# EAGLE board USBIRtoy.v2a-PTH (EAGLE 5.06)
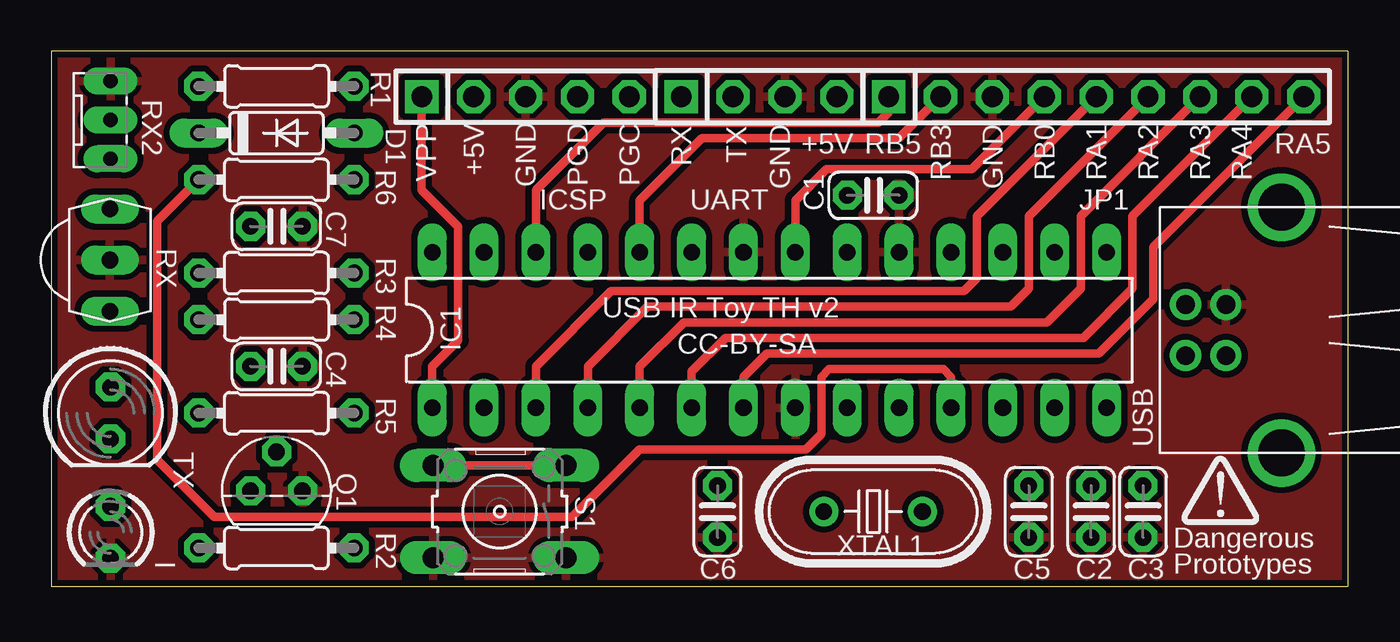
[diagram p0: board, top side]
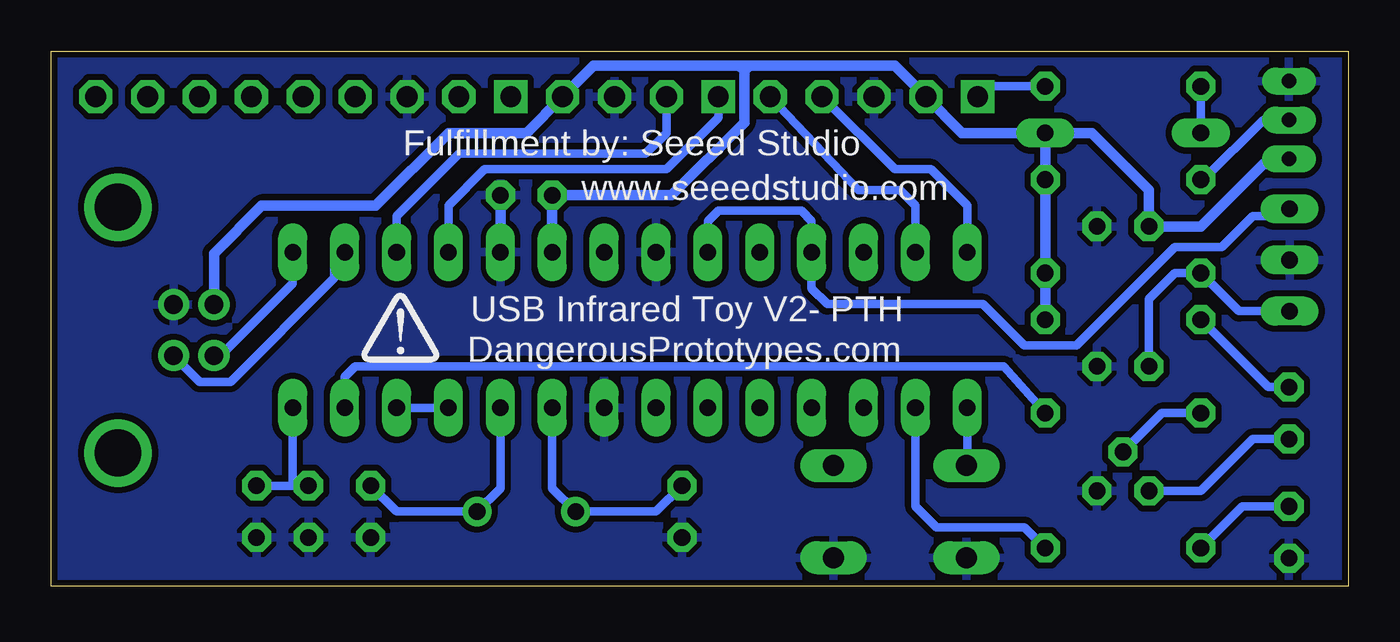
[diagram p1: board, bottom side, seen from below]

Size 63.51 x 26.21 mm. Coordinates in mm from the lower left corner, seen from the top.
Outline: 63.47,0 0,0 0,26.21 63.47,26.21
Outline: 63.51,0 63.51,26.21
Copper layers (1*16): Top 0.035mm / dielectric 1.5mm / Bottom 0.035mm
Design rules "SparkFun": minimum track width 8mil, minimum drill 20mil, track to track 8mil, track to pad 8mil, pad to pad 8mil, via to via 8mil, smd to smd 8mil, copper to edge 10mil, drill to drill 8mil, minimum pad ring 12mil, minimum via ring 10mil, stop-mask expansion 4mil, vias tented up to drill 25mil, thermal gap 10mil

## Footprints (pad centres in the part's own frame; a part is rotated, then mirrored left to right if it is on the bottom)
C025-024X044 = drill 0.813 octagon: 1 -1.27,0; 2 1.27,0
DO35-7 = drill 0.813 long: A 3.81,0; C -3.81,0
LED3MM = drill 0.813 octagon: A -1.27,0; K 1.27,0
DIL28-3 = drill 0.813 long: 1 -16.51,-3.81; 2 -13.97,-3.81; 3 -11.43,-3.81; 4 -8.89,-3.81; 5 -6.35,-3.81; 6 -3.81,-3.81; 7 -1.27,-3.81; 8 1.27,-3.81; 9 3.81,-3.81; 10 6.35,-3.81; 11 8.89,-3.81; 12 11.43,-3.81; 13 13.97,-3.81; 14 16.51,-3.81; 15 16.51,3.81; 16 13.97,3.81; 17 11.43,3.81; 18 8.89,3.81; 19 6.35,3.81; 20 3.81,3.81; 21 1.27,3.81; 22 -1.27,3.81; 23 -3.81,3.81; 24 -6.35,3.81; 25 -8.89,3.81; 26 -11.43,3.81; 27 -13.97,3.81; 28 -16.51,3.81
1X05 = drill 1.016 square: 1 -5.08,0 | drill 1.016 octagon: 2 -2.54,0; 3 0,0; 4 2.54,0; 5 5.08,0
1X09 = drill 1.016 square: 1 -10.16,0 | drill 1.016 octagon: 2 -7.62,0; 3 -5.08,0; 4 -2.54,0; 5 0,0; 6 2.54,0; 7 5.08,0; 8 7.62,0; 9 10.16,0
TO92 = drill 0.813 octagon: 1 1.27,0; 2 0,1.905; 3 -1.27,0
0204/7 = drill 0.813 octagon: 1 -3.81,0; 2 3.81,0
TSOP18XX = drill 0.813 long: GND -0.001,-0.027; OUT -2.501,-0.027; VCC 2.499,-0.027
QSE15X = drill 0.7 long: 1 -1.9,-0.51; 2 0,-0.51; 3 1.91,-0.51
B3F-10XX = drill 1.016 long: 1 -3.251,2.261; 2 3.251,2.261; 3 -3.251,-2.261; 4 3.251,-2.261
LED5MM = drill 0.813 octagon: A -1.27,0; K 1.27,0
1X04 = drill 1.016 square: 1 -3.81,0 | drill 1.016 octagon: 2 -1.27,0; 3 1.27,0; 4 3.81,0
USB-B-H = drill 0.914 round: D+ 0,1.25; D- 1.981,1.25; GND 0,-1.25; VBUS 1.981,-1.25 | drill 2.286 round: GND@1 -2.718,6.02; GND@2 -2.718,-6.02
HC49U70 = drill 0.813 round: 1 -2.413,0; 2 2.413,0

## Placement (x,y rotation side)
C1  0.1uf  [C025-024X044]  40.25,19.15 0 top
C2  0.1uF  [C025-024X044]  50.91,3.66 270 top
C3  0.1uF  [C025-024X044]  53.45,3.66 270 top
C4  0.1uF  [C025-024X044]  11.04,10.77 0 top
C5  27pf  [C025-024X044]  47.87,3.66 270 top
C6  27pf  [C025-024X044]  32.63,3.66 270 top
C7  0.1uF  [C025-024X044]  11.04,17.63 0 top
D1  1N4148DO35-7  [DO35-7]  11.04,22.2 0 top
I  LED  [LED3MM]  2.91,2.64 270 top
IC1  PIC18F2550_28DIP  [DIL28-3]  35.17,12.55 0 top
ICSP  [1X05]  23.23,23.98 0 top
JP1  [1X09]  51.17,23.98 0 top
Q1  BC547  [TO92]  11.04,4.67 0 top
R1  10k  [0204/7]  11.04,24.49 180 top
R2  2K7  [0204/7]  11.04,1.88 0 top
R3  390  [0204/7]  11.04,15.34 0 top
R4  22R  [0204/7]  11.04,13.06 180 top
R5  1K  [0204/7]  11.04,8.48 0 top
R6  10K  [0204/7]  11.04,19.91 0 top
RX  TSOP34838  [TSOP18XX]  2.91,15.98 270 top
RX2  QSE159  [QSE15X]  2.4,22.83 90 top
S1  [B3F-10XX]  21.96,3.66 180 top
TX  940nm IR LED 20mA  [LED5MM]  2.91,8.48 270 top
U$1  [DP-LOGO]  55.33,3 0 top
U$2  [DP-LOGO]  48.32,10.97 0 bottom
UART  [1X04]  34.66,23.98 0 top
USB  USB  [USB-B-H]  57.52,12.55 180 top
XTAL1  20Mhz  [HC49U70]  40.25,3.66 180 top

## Library data of the parts
C1-C7 R1-R6 = rcl
D1 = diode
I TX = led
IC1 = microchip
ICSP = pinhead-2
JP1 UART = pinhean-jer
Q1 = transistor-npn
RX = tsop
RX2 = dp_devices
S1 = switch-omron
U$1 U$2 = DP-logo
USB = con-usb-2
XTAL1 = crystal

## Nets
GND: C1.2 C2.2 C3.2 C4.2 C5.2 C6.2 C7.2 I.K IC1.8 IC1.19 IC1.22 ICSP.3 JP1.3 Q1.1 RX2.3 RX.GND S1.1 S1.2 UART.3 USB.GND
IRDETECT: IC1.11 IC1.12 R6.1 RX2.2
IRRX: IC1.23 IC1.25 RX.OUT
MCLR: IC1.1 ICSP.1 R1.1 S1.3 S1.4
N$1: C6.1 IC1.9 XTAL1.2
N$2: C5.1 IC1.10 XTAL1.1
N$3: C2.1 C3.1 IC1.14
N$6: R4.2 TX.A
N$7: I.A R2.1
N$8: C4.1 R3.1 RX.VCC
N$9: IC1.2 R2.2
N$10: D1.C R1.2
N$11: IC1.13 R5.2
N$12: Q1.2 R5.1
N$13: Q1.3 TX.K
PGC: IC1.27 ICSP.5
PGD: IC1.28 ICSP.4
RA1: IC1.3 JP1.5
RA2: IC1.4 JP1.6
RA3: IC1.5 JP1.7
RA4: IC1.6 JP1.8
RA5: IC1.7 JP1.9
RB0: IC1.21 JP1.4
RB3: IC1.24 JP1.2
RB5: IC1.26 JP1.1
RC4: IC1.15 USB.D-
RC5: IC1.16 USB.D+
RX: IC1.18 UART.1
TX: IC1.17 UART.2
VCC: C1.1 C7.1 D1.A IC1.20 ICSP.2 R3.2 R4.1 R6.2 RX2.1 UART.4 USB.VBUS

## Tracks (layer width: path | path; a pad name or v marks a point on that pad's centre or on a via)
GND
  Bottom 0.508: IC1.19 C1.2
  pour Bottom (isolate 0.305): -0.9,26.52 -0.9,-0.15 63.87,-0.15 63.87,26.52
  pour Top (isolate 0.305): -0.9,26.52 -0.9,-0.15 63.87,-0.15 63.87,26.52
IRDETECT
  Top 0.406: IC1.11 44.06,10.26 43.68,10.64 38.09,10.64 37.71,10.26 37.71,7.47 36.94,6.71 28.82,6.71 25.51,3.4 7.99,3.4 5.19,6.2 5.19,17.88 R6.1
  Bottom 0.406: IC1.11 IC1.12 | R6.1 7.1,19.91 4.18,22.83 RX2.2
IRRX
  Bottom 0.406: IC1.23 31.36,17.88 30.85,18.39 26.78,18.39 26.28,17.88 IC1.25 26.28,14.58 25.51,13.82 17.89,13.82 15.86,11.79 13.32,11.79 8.5,16.61 6.21,16.61 4.69,18.14 3.22,18.14 RX.OUT
MCLR
  Top 0.406: ICSP.1 18.15,19.41 19.93,17.63 19.93,12.04 18.66,10.77 IC1.1 | S1.4 S1.3
  Bottom 0.406: IC1.1 18.66,5.97 S1.4 | R1.1 17.64,24.49 ICSP.1
N$1
  Bottom 0.406: IC1.9 38.98,4.8 XTAL1.2 33.9,3.66 C6.1
N$2
  Bottom 0.406: IC1.10 41.52,4.8 XTAL1.1 46.6,3.66 C5.1
N$3
  Bottom 0.406: IC1.14 51.68,4.93 C2.1 C3.1
N$6
  Bottom 0.406: TX.A 3.92,9.75 R4.2
N$7
  Bottom 0.406: I.A 5.19,3.91 R2.1
N$8
  Bottom 0.406: RX.VCC 5.36,13.48 R3.1 8.5,15.34 9.77,14.07 C4.1
N$9
  Bottom 0.406: IC1.2 21.2,3.91 20.18,2.9 15.86,2.9 R2.2
N$10
  Bottom 0.406: D1.C R1.2
N$11
  Bottom 0.406: IC1.13 49.14,10.26 48.63,10.77 16.88,10.77 R5.2
N$12
  Bottom 0.406: R5.1 9.13,8.48 Q1.2
N$13
  Bottom 0.406: Q1.3 7.23,4.67 4.69,7.21 TX.K
PGC
  Bottom 0.406: IC1.27 21.2,18.64 21.96,19.41 23.99,19.41 ICSP.5
PGD
  Bottom 0.406: IC1.28 18.66,18.64 20.43,20.42 22.21,20.42 ICSP.4
RA1
  Top 0.406: IC1.3 23.74,10.77 27.42,14.45 44.69,14.45 45.33,15.09 45.33,18.14 JP1.5
RA2
  Top 0.406: JP1.6 47.87,18.14 47.87,14.58 46.98,13.69 29.2,13.69 26.28,10.77 IC1.4
RA3
  Top 0.406: JP1.7 50.41,18.14 50.41,14.58 48.76,12.93 30.98,12.93 28.82,10.77 IC1.5
RA4
  Top 0.406: JP1.8 52.95,18.14 52.95,14.58 50.53,12.17 33.01,12.17 31.36,10.52 IC1.6
RA5
  Top 0.406: JP1.9 53.96,16.61 53.96,14.07 51.3,11.4 35.04,11.4 33.9,10.26 IC1.7
RB0
  Top 0.406: JP1.4 45.07,20.42 37.96,20.42 36.44,18.9 IC1.21
RB3
  Top 0.406: JP1.2 41.52,21.95 31.86,21.95 28.82,18.9 IC1.24
RB5
  Top 0.406: JP1.1 41.01,23.22 40.5,22.71 27.04,22.71 23.74,19.41 IC1.26
RC4
  Bottom 0.406: USB.D- 55.21,11.3 51.68,14.83 IC1.15
RC5
  Bottom 0.406: IC1.16 49.39,16.36 49.64,16.1 49.64,15.09 54.72,10.01 56.25,10.01 57.52,11.28 USB.D+
RX
  Bottom 0.406: UART.1 30.85,22.96 33.39,20.42 42.28,20.42 44.06,18.64 IC1.18
TX
  Bottom 0.406: UART.2 33.39,22.2 34.4,21.18 43.55,21.18 46.6,18.14 IC1.17
VCC
  Bottom 0.508: IC1.20 C1.1 33.13,19.15 29.58,22.71 29.58,25.25 | R4.1 R3.2 R6.2 D1.A | 29.58,25.5 29.83,25.5 | 29.83,25.5 36.94,25.5 UART.4 40.25,22.2 44.06,22.2 47.61,18.64 53.2,18.64 55.54,16.31 USB.VBUS | 29.58,25.25 29.58,25.5 | 29.32,25.5 22.21,25.5 ICSP.2 18.91,22.2 D1.A | 29.32,25.5 29.58,25.25 | 29.58,25.25 29.83,25.5 | 29.32,25.5 29.58,25.5 | D1.A 12.56,22.2 9.77,19.41 C7.1 7.23,17.63 4.18,20.68 3.17,20.68 RX2.1

## Text on the board
tNames: VPP | +5V | GND | PGD | PGC | RX | TX | GND | RB3 | GND | RB0 | RA1 | RA2 | RA3 | RA4 | +5V | RB5 | RA5 | RX | USB IR Toy TH v2 | CC-BY-SA | Dangerous | Prototypes
bNames: Fulfillment by: Seeed Studio | www.seeedstudio.com | USB Infrared Toy V2- PTH | DangerousPrototypes.com
Reference: Programming Header | Serial Port | Expansion | MCLR | +5V | GND | DATA | CLOCK | RX | TX | GND | +5V | RB5 | RB3 | GND | RB0 | RA1 | RA2 | RA3 | RA4 | RA5 | USB INFRARED TOY | CC-BY-SA | Ian Lesnet 2010 | LED | http://dangerousprototypes.com